# Altium PCB carrier_board.PcbDoc (part 5 of 18)
Units mm, origin at the board's own origin, x right, y up, seen from the top; angles counter-clockwise.
Board outline 146 x 102 mm, 20 copper layers (F.Cu, F.Mask, B.Cu, B.Mask, In1.Cu, F.SilkS, In2.Cu, B.SilkS, F.Adhes, B.Adhes, F.Paste, B.Paste, Dwgs.User, Cmts.User, Eco1.User, Eco2.User, Edge.Cuts, Margin, B.CrtYd, F.CrtYd); 256 components, 384 nets, 1262 pads, 1024 vias.
Unrouted connection lines stored in the file: 117.
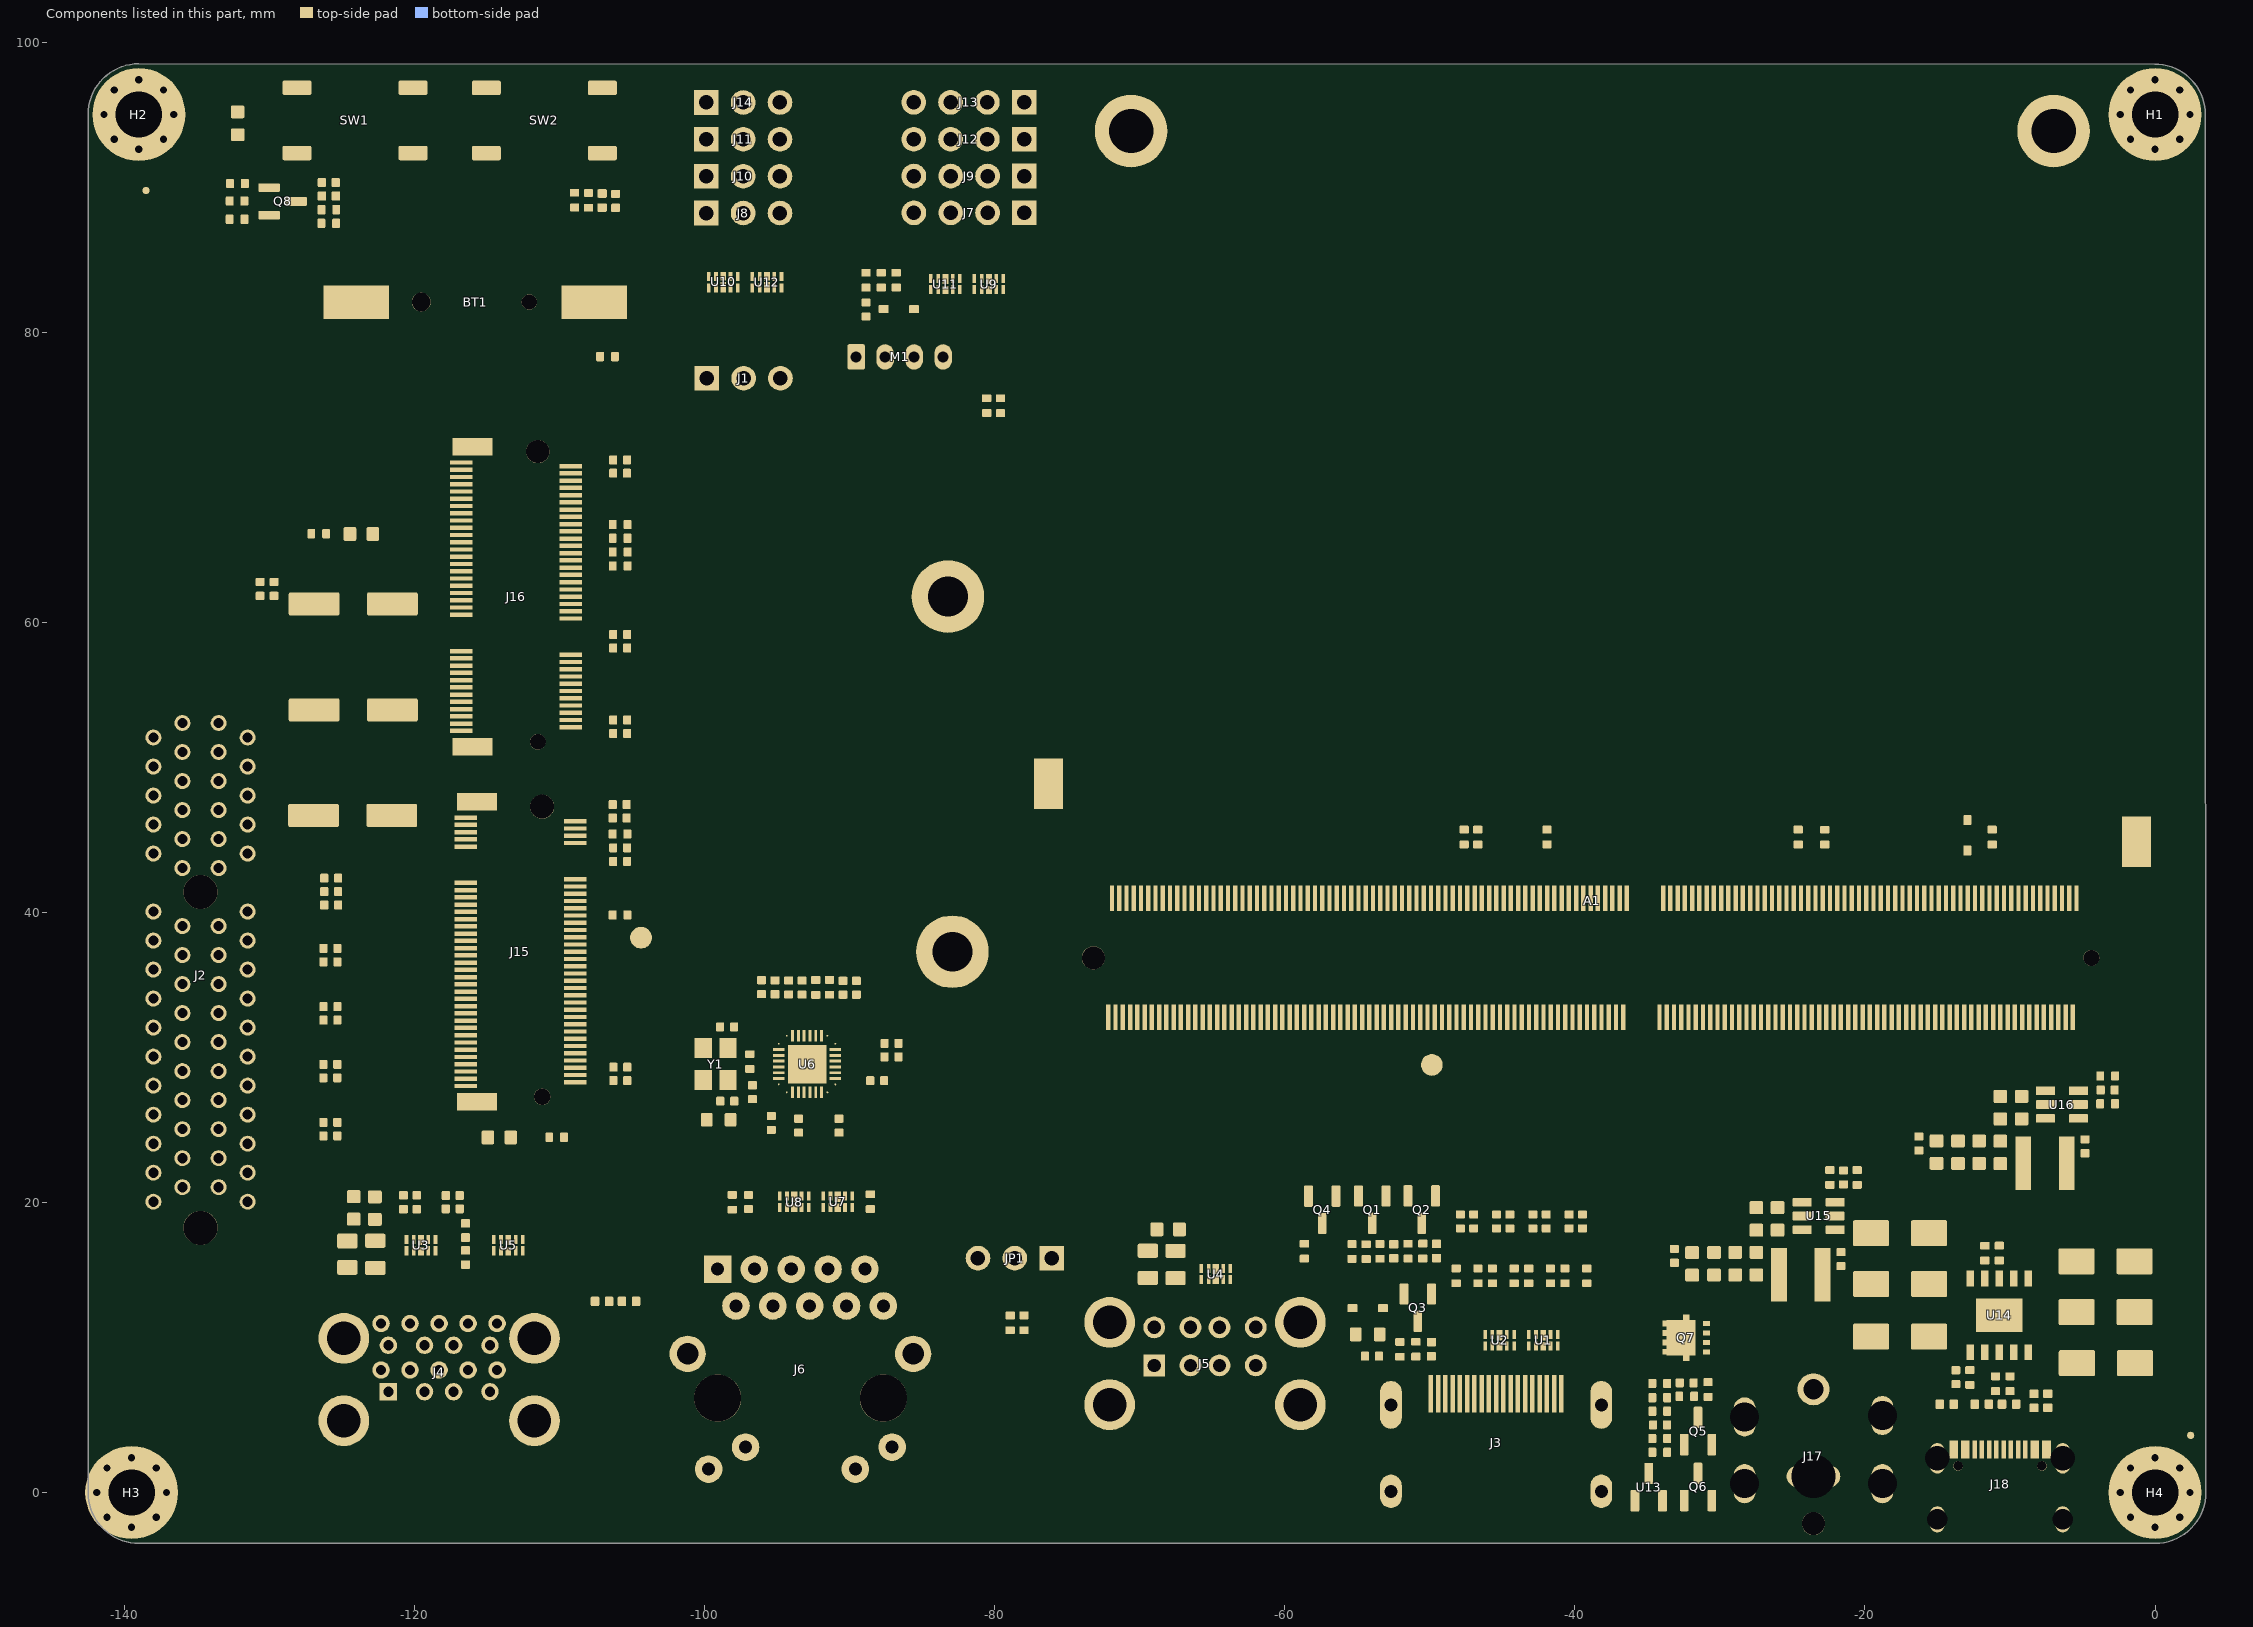
[diagram p16: the components of this part, seen from the top]

## Design rules (kind name [scope] priority, off if disabled: settings) (continued)
PolygonConnect Polygon_F.Cu-Net-(Q8-G)-1_ConnectDirect [IsNamedPolygon('F.Cu-Net-(Q8-G)-1')] p867: connectstyle=Direct reliefconductorwidth=0.254 reliefentries=4 polygonreliefangle="90 Angle" airgapwidth=0.254
PolygonConnect "Polygon_F.Cu-/LattePanda Module/SUSCLK_WIFI-3_ConnectDirect" [IsNamedPolygon('F.Cu-/LattePanda Module/SUSCLK_WIFI-3')] p868: connectstyle=Direct reliefconductorwidth=0.254 reliefentries=4 polygonreliefangle="90 Angle" airgapwidth=0.254
PolygonConnect Polygon_F.Cu-/USB2.0&USB3.0/CON_USB3_SSRX_N_ConnectDirect [IsNamedPolygon('F.Cu-/USB2.0&USB3.0/CON_USB3_SSRX_N')] p869: connectstyle=Direct reliefconductorwidth=0.254 reliefentries=4 polygonreliefangle="90 Angle" airgapwidth=0.254
PolygonConnect Polygon_F.Cu-+1V0-6_ConnectDirect [IsNamedPolygon('F.Cu-+1V0-6')] p870: connectstyle=Direct reliefconductorwidth=0.254 reliefentries=4 polygonreliefangle="90 Angle" airgapwidth=0.254
PolygonConnect Polygon_F.Cu-/USB2.0&USB3.0/CON_USB1_D_P-3_ConnectDirect [IsNamedPolygon('F.Cu-/USB2.0&USB3.0/CON_USB1_D_P-3')] p871: connectstyle=Direct reliefconductorwidth=0.254 reliefentries=4 polygonreliefangle="90 Angle" airgapwidth=0.254
PolygonConnect Polygon_F.Cu-/USB2.0&USB3.0/CON_USB3_SSTX_N-1_ConnectDirect [IsNamedPolygon('F.Cu-/USB2.0&USB3.0/CON_USB3_SSTX_N-1')] p872: connectstyle=Direct reliefconductorwidth=0.254 reliefentries=4 polygonreliefangle="90 Angle" airgapwidth=0.254
PolygonConnect Polygon_F.Cu-Net-(U14-VBUS)-1_ConnectDirect [IsNamedPolygon('F.Cu-Net-(U14-VBUS)-1')] p873: connectstyle=Direct reliefconductorwidth=0.254 reliefentries=4 polygonreliefangle="90 Angle" airgapwidth=0.254
PolygonConnect Polygon_F.Cu-+3V3-35_ConnectDirect [IsNamedPolygon('F.Cu-+3V3-35')] p874: connectstyle=Direct reliefconductorwidth=0.254 reliefentries=4 polygonreliefangle="90 Angle" airgapwidth=0.254
PolygonConnect "Polygon_F.Cu-/LattePanda Module/HSIO_10_TX--2_ConnectDirect" [IsNamedPolygon('F.Cu-/LattePanda Module/HSIO_10_TX--2')] p875: connectstyle=Direct reliefconductorwidth=0.254 reliefentries=4 polygonreliefangle="90 Angle" airgapwidth=0.254
PolygonConnect "Polygon_F.Cu-/LattePanda Module/HSIO_10_TX+-2_ConnectDirect" [IsNamedPolygon('F.Cu-/LattePanda Module/HSIO_10_TX+-2')] p876: connectstyle=Direct reliefconductorwidth=0.254 reliefentries=4 polygonreliefangle="90 Angle" airgapwidth=0.254
PolygonConnect Polygon_F.Cu-/HDMI/DDI_B_TX1+_ConnectDirect [IsNamedPolygon('F.Cu-/HDMI/DDI_B_TX1+')] p877: connectstyle=Direct reliefconductorwidth=0.254 reliefentries=4 polygonreliefangle="90 Angle" airgapwidth=0.254
PolygonConnect Polygon_F.Cu-GND-66_ConnectDirect [IsNamedPolygon('F.Cu-GND-66')] p878: connectstyle=Direct reliefconductorwidth=0.254 reliefentries=4 polygonreliefangle="90 Angle" airgapwidth=0.254
PolygonConnect Polygon_F.Cu-GND-65_ConnectDirect [IsNamedPolygon('F.Cu-GND-65')] p879: connectstyle=Direct reliefconductorwidth=0.254 reliefentries=4 polygonreliefangle="90 Angle" airgapwidth=0.254
PolygonConnect Polygon_F.Cu-/GPIO/SOC_UART0_TX_ConnectDirect [IsNamedPolygon('F.Cu-/GPIO/SOC_UART0_TX')] p880: connectstyle=Direct reliefconductorwidth=0.254 reliefentries=4 polygonreliefangle="90 Angle" airgapwidth=0.254
PolygonConnect "Polygon_F.Cu-/PCIe x4/PCIE30_TX1_P_ConnectDirect" [IsNamedPolygon('F.Cu-/PCIe x4/PCIE30_TX1_P')] p881: connectstyle=Direct reliefconductorwidth=0.254 reliefentries=4 polygonreliefangle="90 Angle" airgapwidth=0.254
PolygonConnect Polygon_F.Cu-+3V3-34_ConnectDirect [IsNamedPolygon('F.Cu-+3V3-34')] p882: connectstyle=Direct reliefconductorwidth=0.254 reliefentries=4 polygonreliefangle="90 Angle" airgapwidth=0.254
PolygonConnect Polygon_F.Cu-Net-(Q7-G)-3_ConnectDirect [IsNamedPolygon('F.Cu-Net-(Q7-G)-3')] p883: connectstyle=Direct reliefconductorwidth=0.254 reliefentries=4 polygonreliefangle="90 Angle" airgapwidth=0.254
PolygonConnect "Polygon_F.Cu-/Gigabit Ethernet/MDI0+_ConnectDirect" [IsNamedPolygon('F.Cu-/Gigabit Ethernet/MDI0+')] p884: connectstyle=Direct reliefconductorwidth=0.254 reliefentries=4 polygonreliefangle="90 Angle" airgapwidth=0.254
PolygonConnect Polygon_F.Cu-/USB2.0&USB3.0/CON_USB1_D_P-2_ConnectDirect [IsNamedPolygon('F.Cu-/USB2.0&USB3.0/CON_USB1_D_P-2')] p885: connectstyle=Direct reliefconductorwidth=0.254 reliefentries=4 polygonreliefangle="90 Angle" airgapwidth=0.254
PolygonConnect Polygon_F.Cu-/GPIO/SOC_UART0_RX-1_ConnectDirect [IsNamedPolygon('F.Cu-/GPIO/SOC_UART0_RX-1')] p886: connectstyle=Direct reliefconductorwidth=0.254 reliefentries=4 polygonreliefangle="90 Angle" airgapwidth=0.254
PolygonConnect Polygon_F.Cu-/USB2.0&USB3.0/CON_USB3_SSRX_P-3_ConnectDirect [IsNamedPolygon('F.Cu-/USB2.0&USB3.0/CON_USB3_SSRX_P-3')] p887: connectstyle=Direct reliefconductorwidth=0.254 reliefentries=4 polygonreliefangle="90 Angle" airgapwidth=0.254
PolygonConnect Polygon_F.Cu-Net-(Q4-G)_ConnectDirect [IsNamedPolygon('F.Cu-Net-(Q4-G)')] p888: connectstyle=Direct reliefconductorwidth=0.254 reliefentries=4 polygonreliefangle="90 Angle" airgapwidth=0.254
PolygonConnect Polygon_F.Cu-GND-64_ConnectDirect [IsNamedPolygon('F.Cu-GND-64')] p889: connectstyle=Direct reliefconductorwidth=0.254 reliefentries=4 polygonreliefangle="90 Angle" airgapwidth=0.254
PolygonConnect Polygon_F.Cu-/HDMI/TMDS_D0+-3_ConnectDirect [IsNamedPolygon('F.Cu-/HDMI/TMDS_D0+-3')] p890: connectstyle=Direct reliefconductorwidth=0.254 reliefentries=4 polygonreliefangle="90 Angle" airgapwidth=0.254
PolygonConnect Polygon_F.Cu-/GPIO/SOC_UART1_RX-2_ConnectDirect [IsNamedPolygon('F.Cu-/GPIO/SOC_UART1_RX-2')] p891: connectstyle=Direct reliefconductorwidth=0.254 reliefentries=4 polygonreliefangle="90 Angle" airgapwidth=0.254
PolygonConnect "Polygon_F.Cu-/LattePanda Module/REFCLK2+_ConnectDirect" [IsNamedPolygon('F.Cu-/LattePanda Module/REFCLK2+')] p892: connectstyle=Direct reliefconductorwidth=0.254 reliefentries=4 polygonreliefangle="90 Angle" airgapwidth=0.254
PolygonConnect Polygon_F.Cu-+1V0-5_ConnectDirect [IsNamedPolygon('F.Cu-+1V0-5')] p893: connectstyle=Direct reliefconductorwidth=0.254 reliefentries=4 polygonreliefangle="90 Angle" airgapwidth=0.254
PolygonConnect "Polygon_F.Cu-/LattePanda Module/SUSCLK_WIFI-2_ConnectDirect" [IsNamedPolygon('F.Cu-/LattePanda Module/SUSCLK_WIFI-2')] p894: connectstyle=Direct reliefconductorwidth=0.254 reliefentries=4 polygonreliefangle="90 Angle" airgapwidth=0.254
PolygonConnect "Polygon_F.Cu-/M.2 E&M Key/~{CLKREQE}-1_ConnectDirect" [IsNamedPolygon('F.Cu-/M.2 E&M Key/~{CLKREQE}-1')] p895: connectstyle=Direct reliefconductorwidth=0.254 reliefentries=4 polygonreliefangle="90 Angle" airgapwidth=0.254
PolygonConnect "Polygon_F.Cu-/LattePanda Module/USB_2_P7+-1_ConnectDirect" [IsNamedPolygon('F.Cu-/LattePanda Module/USB_2_P7+-1')] p896: connectstyle=Direct reliefconductorwidth=0.254 reliefentries=4 polygonreliefangle="90 Angle" airgapwidth=0.254
PolygonConnect Polygon_F.Cu-Net-(Q5-D)-1_ConnectDirect [IsNamedPolygon('F.Cu-Net-(Q5-D)-1')] p897: connectstyle=Direct reliefconductorwidth=0.254 reliefentries=4 polygonreliefangle="90 Angle" airgapwidth=0.254
PolygonConnect "Polygon_F.Cu-/LattePanda Module/REFCLK0-_ConnectDirect" [IsNamedPolygon('F.Cu-/LattePanda Module/REFCLK0-')] p898: connectstyle=Direct reliefconductorwidth=0.254 reliefentries=4 polygonreliefangle="90 Angle" airgapwidth=0.254
PolygonConnect Polygon_F.Cu-GND-63_ConnectDirect [IsNamedPolygon('F.Cu-GND-63')] p899: connectstyle=Direct reliefconductorwidth=0.254 reliefentries=4 polygonreliefangle="90 Angle" airgapwidth=0.254
PolygonConnect Polygon_F.Cu-/PSU/PWR_EN-4_ConnectDirect [IsNamedPolygon('F.Cu-/PSU/PWR_EN-4')] p900: connectstyle=Direct reliefconductorwidth=0.254 reliefentries=4 polygonreliefangle="90 Angle" airgapwidth=0.254
PolygonConnect Polygon_F.Cu-GND-62_ConnectDirect [IsNamedPolygon('F.Cu-GND-62')] p901: connectstyle=Direct reliefconductorwidth=0.254 reliefentries=4 polygonreliefangle="90 Angle" airgapwidth=0.254
PolygonConnect Polygon_F.Cu-/~{PLT_RST}-2_ConnectDirect [IsNamedPolygon('F.Cu-/~{PLT_RST}-2')] p902: connectstyle=Direct reliefconductorwidth=0.254 reliefentries=4 polygonreliefangle="90 Angle" airgapwidth=0.254
PolygonConnect Polygon_F.Cu-/GPIO/I2C2_SCL-2_ConnectDirect [IsNamedPolygon('F.Cu-/GPIO/I2C2_SCL-2')] p903: connectstyle=Direct reliefconductorwidth=0.254 reliefentries=4 polygonreliefangle="90 Angle" airgapwidth=0.254
PolygonConnect Polygon_F.Cu-Net-(Q5-S)_ConnectDirect [IsNamedPolygon('F.Cu-Net-(Q5-S)')] p904: connectstyle=Direct reliefconductorwidth=0.254 reliefentries=4 polygonreliefangle="90 Angle" airgapwidth=0.254
PolygonConnect Polygon_F.Cu-/HDMI/TMDS_D0+-2_ConnectDirect [IsNamedPolygon('F.Cu-/HDMI/TMDS_D0+-2')] p905: connectstyle=Direct reliefconductorwidth=0.254 reliefentries=4 polygonreliefangle="90 Angle" airgapwidth=0.254
PolygonConnect Polygon_F.Cu-/HDMI/TMDS_D2--2_ConnectDirect [IsNamedPolygon('F.Cu-/HDMI/TMDS_D2--2')] p906: connectstyle=Direct reliefconductorwidth=0.254 reliefentries=4 polygonreliefangle="90 Angle" airgapwidth=0.254
PolygonConnect Polygon_F.Cu-+12VA_ConnectDirect [IsNamedPolygon('F.Cu-+12VA')] p907: connectstyle=Direct reliefconductorwidth=0.254 reliefentries=4 polygonreliefangle="90 Angle" airgapwidth=0.254
PolygonConnect Polygon_F.Cu-Net-(U15-SW)_ConnectDirect [IsNamedPolygon('F.Cu-Net-(U15-SW)')] p908: connectstyle=Direct reliefconductorwidth=0.254 reliefentries=4 polygonreliefangle="90 Angle" airgapwidth=0.254
PolygonConnect "Polygon_F.Cu-/PCIe x4/PCIE30_TX2_P-1_ConnectDirect" [IsNamedPolygon('F.Cu-/PCIe x4/PCIE30_TX2_P-1')] p909: connectstyle=Direct reliefconductorwidth=0.254 reliefentries=4 polygonreliefangle="90 Angle" airgapwidth=0.254
PolygonConnect Polygon_F.Cu-/~{WAKE}-2_ConnectDirect [IsNamedPolygon('F.Cu-/~{WAKE}-2')] p910: connectstyle=Direct reliefconductorwidth=0.254 reliefentries=4 polygonreliefangle="90 Angle" airgapwidth=0.254
PolygonConnect Polygon_F.Cu-+3V3-33_ConnectDirect [IsNamedPolygon('F.Cu-+3V3-33')] p911: connectstyle=Direct reliefconductorwidth=0.254 reliefentries=4 polygonreliefangle="90 Angle" airgapwidth=0.254
PolygonConnect Polygon_F.Cu-+3V3-32_ConnectDirect [IsNamedPolygon('F.Cu-+3V3-32')] p912: connectstyle=Direct reliefconductorwidth=0.254 reliefentries=4 polygonreliefangle="90 Angle" airgapwidth=0.254
PolygonConnect "Polygon_F.Cu-/LattePanda Module/HSIO_11_TX+_ConnectDirect" [IsNamedPolygon('F.Cu-/LattePanda Module/HSIO_11_TX+')] p913: connectstyle=Direct reliefconductorwidth=0.254 reliefentries=4 polygonreliefangle="90 Angle" airgapwidth=0.254
PolygonConnect Polygon_F.Cu-/HDMI/TMDS_D1--2_ConnectDirect [IsNamedPolygon('F.Cu-/HDMI/TMDS_D1--2')] p914: connectstyle=Direct reliefconductorwidth=0.254 reliefentries=4 polygonreliefangle="90 Angle" airgapwidth=0.254
PolygonConnect Polygon_F.Cu-Net-(U14-VBUS)_ConnectDirect [IsNamedPolygon('F.Cu-Net-(U14-VBUS)')] p915: connectstyle=Direct reliefconductorwidth=0.254 reliefentries=4 polygonreliefangle="90 Angle" airgapwidth=0.254
PolygonConnect Polygon_F.Cu-GND-61_ConnectDirect [IsNamedPolygon('F.Cu-GND-61')] p916: connectstyle=Direct reliefconductorwidth=0.254 reliefentries=4 polygonreliefangle="90 Angle" airgapwidth=0.254
PolygonConnect Polygon_F.Cu-/GPIO/SOC_UART2_RX-3_ConnectDirect [IsNamedPolygon('F.Cu-/GPIO/SOC_UART2_RX-3')] p917: connectstyle=Direct reliefconductorwidth=0.254 reliefentries=4 polygonreliefangle="90 Angle" airgapwidth=0.254
PolygonConnect Polygon_F.Cu-Net-(A1-TCP1_HPD)_ConnectDirect [IsNamedPolygon('F.Cu-Net-(A1-TCP1_HPD)')] p918: connectstyle=Direct reliefconductorwidth=0.254 reliefentries=4 polygonreliefangle="90 Angle" airgapwidth=0.254
PolygonConnect Polygon_F.Cu-Net-(D9-A)_ConnectDirect [IsNamedPolygon('F.Cu-Net-(D9-A)')] p919: connectstyle=Direct reliefconductorwidth=0.254 reliefentries=4 polygonreliefangle="90 Angle" airgapwidth=0.254
PolygonConnect Polygon_F.Cu-+3V3-31_ConnectDirect [IsNamedPolygon('F.Cu-+3V3-31')] p920: connectstyle=Direct reliefconductorwidth=0.254 reliefentries=4 polygonreliefangle="90 Angle" airgapwidth=0.254
PolygonConnect "Polygon_F.Cu-/M.2 E&M Key/CON_PCIE_TX_1-_ConnectDirect" [IsNamedPolygon('F.Cu-/M.2 E&M Key/CON_PCIE_TX_1-')] p921: connectstyle=Direct reliefconductorwidth=0.254 reliefentries=4 polygonreliefangle="90 Angle" airgapwidth=0.254
PolygonConnect Polygon_F.Cu-VPullup-2_ConnectDirect [IsNamedPolygon('F.Cu-VPullup-2')] p922: connectstyle=Direct reliefconductorwidth=0.254 reliefentries=4 polygonreliefangle="90 Angle" airgapwidth=0.254
PolygonConnect "Polygon_F.Cu-/M.2 E&M Key/CON_PCIE_TX_1+_ConnectDirect" [IsNamedPolygon('F.Cu-/M.2 E&M Key/CON_PCIE_TX_1+')] p923: connectstyle=Direct reliefconductorwidth=0.254 reliefentries=4 polygonreliefangle="90 Angle" airgapwidth=0.254
PolygonConnect Polygon_F.Cu-GND-60_ConnectDirect [IsNamedPolygon('F.Cu-GND-60')] p924: connectstyle=Direct reliefconductorwidth=0.254 reliefentries=4 polygonreliefangle="90 Angle" airgapwidth=0.254
PolygonConnect Polygon_F.Cu-Net-(Q5-G)-1_ConnectDirect [IsNamedPolygon('F.Cu-Net-(Q5-G)-1')] p925: connectstyle=Direct reliefconductorwidth=0.254 reliefentries=4 polygonreliefangle="90 Angle" airgapwidth=0.254
PolygonConnect Polygon_F.Cu-Net-(J16-~{W_DISABLE2})-1_ConnectDirect [IsNamedPolygon('F.Cu-Net-(J16-~{W_DISABLE2})-1')] p926: connectstyle=Direct reliefconductorwidth=0.254 reliefentries=4 polygonreliefangle="90 Angle" airgapwidth=0.254
PolygonConnect "Polygon_F.Cu-/LattePanda Module/HSIO_2_TX--1_ConnectDirect" [IsNamedPolygon('F.Cu-/LattePanda Module/HSIO_2_TX--1')] p927: connectstyle=Direct reliefconductorwidth=0.254 reliefentries=4 polygonreliefangle="90 Angle" airgapwidth=0.254
PolygonConnect Polygon_F.Cu-GND-59_ConnectDirect [IsNamedPolygon('F.Cu-GND-59')] p928: connectstyle=Direct reliefconductorwidth=0.254 reliefentries=4 polygonreliefangle="90 Angle" airgapwidth=0.254
PolygonConnect Polygon_F.Cu-GND-58_ConnectDirect [IsNamedPolygon('F.Cu-GND-58')] p929: connectstyle=Direct reliefconductorwidth=0.254 reliefentries=4 polygonreliefangle="90 Angle" airgapwidth=0.254
PolygonConnect Polygon_F.Cu-Net-(U14-CFG1)-1_ConnectDirect [IsNamedPolygon('F.Cu-Net-(U14-CFG1)-1')] p930: connectstyle=Direct reliefconductorwidth=0.254 reliefentries=4 polygonreliefangle="90 Angle" airgapwidth=0.254
PolygonConnect Polygon_F.Cu-/USB2.0&USB3.0/CON_USB4_SSRX_P_ConnectDirect [IsNamedPolygon('F.Cu-/USB2.0&USB3.0/CON_USB4_SSRX_P')] p931: connectstyle=Direct reliefconductorwidth=0.254 reliefentries=4 polygonreliefangle="90 Angle" airgapwidth=0.254
PolygonConnect "Polygon_F.Cu-/Gigabit Ethernet/GbE_PCIe_RX-_ConnectDirect" [IsNamedPolygon('F.Cu-/Gigabit Ethernet/GbE_PCIe_RX-')] p932: connectstyle=Direct reliefconductorwidth=0.254 reliefentries=4 polygonreliefangle="90 Angle" airgapwidth=0.254
PolygonConnect "Polygon_F.Cu-/LattePanda Module/HSIO_2_TX+_ConnectDirect" [IsNamedPolygon('F.Cu-/LattePanda Module/HSIO_2_TX+')] p933: connectstyle=Direct reliefconductorwidth=0.254 reliefentries=4 polygonreliefangle="90 Angle" airgapwidth=0.254
PolygonConnect Polygon_F.Cu-+3V3-30_ConnectDirect [IsNamedPolygon('F.Cu-+3V3-30')] p934: connectstyle=Direct reliefconductorwidth=0.254 reliefentries=4 polygonreliefangle="90 Angle" airgapwidth=0.254
PolygonConnect Polygon_F.Cu-Net-(U6-LANWAKEB)-1_ConnectDirect [IsNamedPolygon('F.Cu-Net-(U6-LANWAKEB)-1')] p935: connectstyle=Direct reliefconductorwidth=0.254 reliefentries=4 polygonreliefangle="90 Angle" airgapwidth=0.254
PolygonConnect Polygon_F.Cu-+3V3-29_ConnectDirect [IsNamedPolygon('F.Cu-+3V3-29')] p936: connectstyle=Direct reliefconductorwidth=0.254 reliefentries=4 polygonreliefangle="90 Angle" airgapwidth=0.254
PolygonConnect Polygon_F.Cu-Net-(D25-A2)-1_ConnectDirect [IsNamedPolygon('F.Cu-Net-(D25-A2)-1')] p937: connectstyle=Direct reliefconductorwidth=0.254 reliefentries=4 polygonreliefangle="90 Angle" airgapwidth=0.254
PolygonConnect Polygon_F.Cu-GND-57_ConnectDirect [IsNamedPolygon('F.Cu-GND-57')] p938: connectstyle=Direct reliefconductorwidth=0.254 reliefentries=4 polygonreliefangle="90 Angle" airgapwidth=0.254
PolygonConnect Polygon_F.Cu-/GPIO/SOC_UART2_RX-2_ConnectDirect [IsNamedPolygon('F.Cu-/GPIO/SOC_UART2_RX-2')] p939: connectstyle=Direct reliefconductorwidth=0.254 reliefentries=4 polygonreliefangle="90 Angle" airgapwidth=0.254
PolygonConnect Polygon_F.Cu-GND-56_ConnectDirect [IsNamedPolygon('F.Cu-GND-56')] p940: connectstyle=Direct reliefconductorwidth=0.254 reliefentries=4 polygonreliefangle="90 Angle" airgapwidth=0.254
PolygonConnect Polygon_F.Cu-/USB2.0&USB3.0/CON_USB4_SSRX_N-2_ConnectDirect [IsNamedPolygon('F.Cu-/USB2.0&USB3.0/CON_USB4_SSRX_N-2')] p941: connectstyle=Direct reliefconductorwidth=0.254 reliefentries=4 polygonreliefangle="90 Angle" airgapwidth=0.254
PolygonConnect Polygon_F.Cu-/GPIO/I2C2_SCL-1_ConnectDirect [IsNamedPolygon('F.Cu-/GPIO/I2C2_SCL-1')] p942: connectstyle=Direct reliefconductorwidth=0.254 reliefentries=4 polygonreliefangle="90 Angle" airgapwidth=0.254
PolygonConnect Polygon_F.Cu-GND-55_ConnectDirect [IsNamedPolygon('F.Cu-GND-55')] p943: connectstyle=Direct reliefconductorwidth=0.254 reliefentries=4 polygonreliefangle="90 Angle" airgapwidth=0.254
PolygonConnect Polygon_F.Cu-Net-(Q5-G)_ConnectDirect [IsNamedPolygon('F.Cu-Net-(Q5-G)')] p944: connectstyle=Direct reliefconductorwidth=0.254 reliefentries=4 polygonreliefangle="90 Angle" airgapwidth=0.254
PolygonConnect "Polygon_F.Cu-/LattePanda Module/USB_2_P7--1_ConnectDirect" [IsNamedPolygon('F.Cu-/LattePanda Module/USB_2_P7--1')] p945: connectstyle=Direct reliefconductorwidth=0.254 reliefentries=4 polygonreliefangle="90 Angle" airgapwidth=0.254
PolygonConnect Polygon_F.Cu-/HDMI/TMDS_D2+-2_ConnectDirect [IsNamedPolygon('F.Cu-/HDMI/TMDS_D2+-2')] p946: connectstyle=Direct reliefconductorwidth=0.254 reliefentries=4 polygonreliefangle="90 Angle" airgapwidth=0.254
PolygonConnect "Polygon_F.Cu-/Gigabit Ethernet/MDI3--1_ConnectDirect" [IsNamedPolygon('F.Cu-/Gigabit Ethernet/MDI3--1')] p947: connectstyle=Direct reliefconductorwidth=0.254 reliefentries=4 polygonreliefangle="90 Angle" airgapwidth=0.254
PolygonConnect Polygon_F.Cu-/~{PLT_RST}-1_ConnectDirect [IsNamedPolygon('F.Cu-/~{PLT_RST}-1')] p948: connectstyle=Direct reliefconductorwidth=0.254 reliefentries=4 polygonreliefangle="90 Angle" airgapwidth=0.254
PolygonConnect "Polygon_F.Cu-/LattePanda Module/HSIO_9_TX+-1_ConnectDirect" [IsNamedPolygon('F.Cu-/LattePanda Module/HSIO_9_TX+-1')] p949: connectstyle=Direct reliefconductorwidth=0.254 reliefentries=4 polygonreliefangle="90 Angle" airgapwidth=0.254
PolygonConnect "Polygon_F.Cu-/LattePanda Module/HSIO_3_TX+_ConnectDirect" [IsNamedPolygon('F.Cu-/LattePanda Module/HSIO_3_TX+')] p950: connectstyle=Direct reliefconductorwidth=0.254 reliefentries=4 polygonreliefangle="90 Angle" airgapwidth=0.254
PolygonConnect Polygon_F.Cu-+3V3-28_ConnectDirect [IsNamedPolygon('F.Cu-+3V3-28')] p951: connectstyle=Direct reliefconductorwidth=0.254 reliefentries=4 polygonreliefangle="90 Angle" airgapwidth=0.254
PolygonConnect Polygon_F.Cu-GND-54_ConnectDirect [IsNamedPolygon('F.Cu-GND-54')] p952: connectstyle=Direct reliefconductorwidth=0.254 reliefentries=4 polygonreliefangle="90 Angle" airgapwidth=0.254
PolygonConnect "Polygon_F.Cu-/LattePanda Module/USB_2_P7+_ConnectDirect" [IsNamedPolygon('F.Cu-/LattePanda Module/USB_2_P7+')] p953: connectstyle=Direct reliefconductorwidth=0.254 reliefentries=4 polygonreliefangle="90 Angle" airgapwidth=0.254
PolygonConnect Polygon_F.Cu-GND-53_ConnectDirect [IsNamedPolygon('F.Cu-GND-53')] p954: connectstyle=Direct reliefconductorwidth=0.254 reliefentries=4 polygonreliefangle="90 Angle" airgapwidth=0.254
PolygonConnect Polygon_F.Cu-Net-(A1-TCP0_HPD)_ConnectDirect [IsNamedPolygon('F.Cu-Net-(A1-TCP0_HPD)')] p955: connectstyle=Direct reliefconductorwidth=0.254 reliefentries=4 polygonreliefangle="90 Angle" airgapwidth=0.254
PolygonConnect Polygon_F.Cu-+3V3-27_ConnectDirect [IsNamedPolygon('F.Cu-+3V3-27')] p956: connectstyle=Direct reliefconductorwidth=0.254 reliefentries=4 polygonreliefangle="90 Angle" airgapwidth=0.254
PolygonConnect Polygon_F.Cu-GND-52_ConnectDirect [IsNamedPolygon('F.Cu-GND-52')] p957: connectstyle=Direct reliefconductorwidth=0.254 reliefentries=4 polygonreliefangle="90 Angle" airgapwidth=0.254
PolygonConnect Polygon_F.Cu-/HDMI/TMDS_D2--1_ConnectDirect [IsNamedPolygon('F.Cu-/HDMI/TMDS_D2--1')] p958: connectstyle=Direct reliefconductorwidth=0.254 reliefentries=4 polygonreliefangle="90 Angle" airgapwidth=0.254
PolygonConnect Polygon_F.Cu-GND-51_ConnectDirect [IsNamedPolygon('F.Cu-GND-51')] p959: connectstyle=Direct reliefconductorwidth=0.254 reliefentries=4 polygonreliefangle="90 Angle" airgapwidth=0.254
PolygonConnect Polygon_F.Cu-+3V3-26_ConnectDirect [IsNamedPolygon('F.Cu-+3V3-26')] p960: connectstyle=Direct reliefconductorwidth=0.254 reliefentries=4 polygonreliefangle="90 Angle" airgapwidth=0.254
PolygonConnect Polygon_F.Cu-+5V-4_ConnectDirect [IsNamedPolygon('F.Cu-+5V-4')] p961: connectstyle=Direct reliefconductorwidth=0.254 reliefentries=4 polygonreliefangle="90 Angle" airgapwidth=0.254
PolygonConnect Polygon_F.Cu-Net-(Q5-D)_ConnectDirect [IsNamedPolygon('F.Cu-Net-(Q5-D)')] p962: connectstyle=Direct reliefconductorwidth=0.254 reliefentries=4 polygonreliefangle="90 Angle" airgapwidth=0.254
PolygonConnect "Polygon_F.Cu-/M.2 E&M Key/CON_PCIE_TX_0+_ConnectDirect" [IsNamedPolygon('F.Cu-/M.2 E&M Key/CON_PCIE_TX_0+')] p963: connectstyle=Direct reliefconductorwidth=0.254 reliefentries=4 polygonreliefangle="90 Angle" airgapwidth=0.254
PolygonConnect Polygon_F.Cu-Net-(U6-ISOLATEB)-1_ConnectDirect [IsNamedPolygon('F.Cu-Net-(U6-ISOLATEB)-1')] p964: connectstyle=Direct reliefconductorwidth=0.254 reliefentries=4 polygonreliefangle="90 Angle" airgapwidth=0.254
PolygonConnect "Polygon_F.Cu-/LattePanda Module/HSIO_8_TX--2_ConnectDirect" [IsNamedPolygon('F.Cu-/LattePanda Module/HSIO_8_TX--2')] p965: connectstyle=Direct reliefconductorwidth=0.254 reliefentries=4 polygonreliefangle="90 Angle" airgapwidth=0.254
PolygonConnect Polygon_F.Cu-Net-(BT1-+)_ConnectDirect [IsNamedPolygon('F.Cu-Net-(BT1-+)')] p966: connectstyle=Direct reliefconductorwidth=0.254 reliefentries=4 polygonreliefangle="90 Angle" airgapwidth=0.254
PolygonConnect Polygon_F.Cu-+3V3-25_ConnectDirect [IsNamedPolygon('F.Cu-+3V3-25')] p967: connectstyle=Direct reliefconductorwidth=0.254 reliefentries=4 polygonreliefangle="90 Angle" airgapwidth=0.254
PolygonConnect Polygon_F.Cu-GND-50_ConnectDirect [IsNamedPolygon('F.Cu-GND-50')] p968: connectstyle=Direct reliefconductorwidth=0.254 reliefentries=4 polygonreliefangle="90 Angle" airgapwidth=0.254
PolygonConnect Polygon_F.Cu-VDC-1_ConnectDirect [IsNamedPolygon('F.Cu-VDC-1')] p969: connectstyle=Direct reliefconductorwidth=0.254 reliefentries=4 polygonreliefangle="90 Angle" airgapwidth=0.254
PolygonConnect Polygon_F.Cu-/USB2.0&USB3.0/CON_USB2_D_N-2_ConnectDirect [IsNamedPolygon('F.Cu-/USB2.0&USB3.0/CON_USB2_D_N-2')] p970: connectstyle=Direct reliefconductorwidth=0.254 reliefentries=4 polygonreliefangle="90 Angle" airgapwidth=0.254
PolygonConnect "Polygon_F.Cu-/LattePanda Module/REFCLK0+-1_ConnectDirect" [IsNamedPolygon('F.Cu-/LattePanda Module/REFCLK0+-1')] p971: connectstyle=Direct reliefconductorwidth=0.254 reliefentries=4 polygonreliefangle="90 Angle" airgapwidth=0.254
PolygonConnect Polygon_F.Cu-/USB2.0&USB3.0/CON_USB2_D_P-1_ConnectDirect [IsNamedPolygon('F.Cu-/USB2.0&USB3.0/CON_USB2_D_P-1')] p972: connectstyle=Direct reliefconductorwidth=0.254 reliefentries=4 polygonreliefangle="90 Angle" airgapwidth=0.254
PolygonConnect Polygon_F.Cu-/USB2.0&USB3.0/CON_USB4_D_N-3_ConnectDirect [IsNamedPolygon('F.Cu-/USB2.0&USB3.0/CON_USB4_D_N-3')] p973: connectstyle=Direct reliefconductorwidth=0.254 reliefentries=4 polygonreliefangle="90 Angle" airgapwidth=0.254
PolygonConnect Polygon_F.Cu-Net-(D23-A)_ConnectDirect [IsNamedPolygon('F.Cu-Net-(D23-A)')] p974: connectstyle=Direct reliefconductorwidth=0.254 reliefentries=4 polygonreliefangle="90 Angle" airgapwidth=0.254
PolygonConnect Polygon_F.Cu-/HDMI/DDI_B_DDC_SCL-1_ConnectDirect [IsNamedPolygon('F.Cu-/HDMI/DDI_B_DDC_SCL-1')] p975: connectstyle=Direct reliefconductorwidth=0.254 reliefentries=4 polygonreliefangle="90 Angle" airgapwidth=0.254
PolygonConnect Polygon_F.Cu-/Fan_Temp/FAN_1_TAC-1_ConnectDirect [IsNamedPolygon('F.Cu-/Fan_Temp/FAN_1_TAC-1')] p976: connectstyle=Direct reliefconductorwidth=0.254 reliefentries=4 polygonreliefangle="90 Angle" airgapwidth=0.254
PolygonConnect "Polygon_F.Cu-/PCIe x4/PCIE30_TX0_P_ConnectDirect" [IsNamedPolygon('F.Cu-/PCIe x4/PCIE30_TX0_P')] p977: connectstyle=Direct reliefconductorwidth=0.254 reliefentries=4 polygonreliefangle="90 Angle" airgapwidth=0.254
PolygonConnect Polygon_F.Cu-Net-(U16-SW)_ConnectDirect [IsNamedPolygon('F.Cu-Net-(U16-SW)')] p978: connectstyle=Direct reliefconductorwidth=0.254 reliefentries=4 polygonreliefangle="90 Angle" airgapwidth=0.254
PolygonConnect Polygon_F.Cu-/GPIO/SOC_UART1_TX_ConnectDirect [IsNamedPolygon('F.Cu-/GPIO/SOC_UART1_TX')] p979: connectstyle=Direct reliefconductorwidth=0.254 reliefentries=4 polygonreliefangle="90 Angle" airgapwidth=0.254
PolygonConnect Polygon_F.Cu-+3V3-24_ConnectDirect [IsNamedPolygon('F.Cu-+3V3-24')] p980: connectstyle=Direct reliefconductorwidth=0.254 reliefentries=4 polygonreliefangle="90 Angle" airgapwidth=0.254
PolygonConnect Polygon_F.Cu-GND-49_ConnectDirect [IsNamedPolygon('F.Cu-GND-49')] p981: connectstyle=Direct reliefconductorwidth=0.254 reliefentries=4 polygonreliefangle="90 Angle" airgapwidth=0.254
PolygonConnect Polygon_F.Cu-GND-48_ConnectDirect [IsNamedPolygon('F.Cu-GND-48')] p982: connectstyle=Direct reliefconductorwidth=0.254 reliefentries=4 polygonreliefangle="90 Angle" airgapwidth=0.254
PolygonConnect Polygon_F.Cu-/HDMI/TMDS_D0--1_ConnectDirect [IsNamedPolygon('F.Cu-/HDMI/TMDS_D0--1')] p983: connectstyle=Direct reliefconductorwidth=0.254 reliefentries=4 polygonreliefangle="90 Angle" airgapwidth=0.254
PolygonConnect "Polygon_F.Cu-/LattePanda Module/~{PWR_SW}-1_ConnectDirect" [IsNamedPolygon('F.Cu-/LattePanda Module/~{PWR_SW}-1')] p984: connectstyle=Direct reliefconductorwidth=0.254 reliefentries=4 polygonreliefangle="90 Angle" airgapwidth=0.254
PolygonConnect Polygon_F.Cu-/HDMI/TMDS_D0+-1_ConnectDirect [IsNamedPolygon('F.Cu-/HDMI/TMDS_D0+-1')] p985: connectstyle=Direct reliefconductorwidth=0.254 reliefentries=4 polygonreliefangle="90 Angle" airgapwidth=0.254
PolygonConnect Polygon_F.Cu-/HDMI/TMDS_CK--1_ConnectDirect [IsNamedPolygon('F.Cu-/HDMI/TMDS_CK--1')] p986: connectstyle=Direct reliefconductorwidth=0.254 reliefentries=4 polygonreliefangle="90 Angle" airgapwidth=0.254
PolygonConnect Polygon_F.Cu-/GPIO/SOC_UART2_RX-1_ConnectDirect [IsNamedPolygon('F.Cu-/GPIO/SOC_UART2_RX-1')] p987: connectstyle=Direct reliefconductorwidth=0.254 reliefentries=4 polygonreliefangle="90 Angle" airgapwidth=0.254
PolygonConnect Polygon_F.Cu-+3V3-23_ConnectDirect [IsNamedPolygon('F.Cu-+3V3-23')] p988: connectstyle=Direct reliefconductorwidth=0.254 reliefentries=4 polygonreliefangle="90 Angle" airgapwidth=0.254
PolygonConnect Polygon_F.Cu-GND-47_ConnectDirect [IsNamedPolygon('F.Cu-GND-47')] p989: connectstyle=Direct reliefconductorwidth=0.254 reliefentries=4 polygonreliefangle="90 Angle" airgapwidth=0.254
PolygonConnect Polygon_F.Cu-/~{WAKE}-1_ConnectDirect [IsNamedPolygon('F.Cu-/~{WAKE}-1')] p990: connectstyle=Direct reliefconductorwidth=0.254 reliefentries=4 polygonreliefangle="90 Angle" airgapwidth=0.254
PolygonConnect Polygon_F.Cu-+3V3-22_ConnectDirect [IsNamedPolygon('F.Cu-+3V3-22')] p991: connectstyle=Direct reliefconductorwidth=0.254 reliefentries=4 polygonreliefangle="90 Angle" airgapwidth=0.254
PolygonConnect "Polygon_F.Cu-/LattePanda Module/HSIO_8_RX-_ConnectDirect" [IsNamedPolygon('F.Cu-/LattePanda Module/HSIO_8_RX-')] p992: connectstyle=Direct reliefconductorwidth=0.254 reliefentries=4 polygonreliefangle="90 Angle" airgapwidth=0.254
PolygonConnect "Polygon_F.Cu-/LattePanda Module/HSIO_10_TX+-1_ConnectDirect" [IsNamedPolygon('F.Cu-/LattePanda Module/HSIO_10_TX+-1')] p993: connectstyle=Direct reliefconductorwidth=0.254 reliefentries=4 polygonreliefangle="90 Angle" airgapwidth=0.254
PolygonConnect Polygon_F.Cu-Net-(U13-REF)-2_ConnectDirect [IsNamedPolygon('F.Cu-Net-(U13-REF)-2')] p994: connectstyle=Direct reliefconductorwidth=0.254 reliefentries=4 polygonreliefangle="90 Angle" airgapwidth=0.254
PolygonConnect Polygon_F.Cu-+1V0-4_ConnectDirect [IsNamedPolygon('F.Cu-+1V0-4')] p995: connectstyle=Direct reliefconductorwidth=0.254 reliefentries=4 polygonreliefangle="90 Angle" airgapwidth=0.254
PolygonConnect Polygon_F.Cu-VPullup-1_ConnectDirect [IsNamedPolygon('F.Cu-VPullup-1')] p996: connectstyle=Direct reliefconductorwidth=0.254 reliefentries=4 polygonreliefangle="90 Angle" airgapwidth=0.254
PolygonConnect Polygon_F.Cu-Net-(U10-NC-Pad6)_ConnectDirect [IsNamedPolygon('F.Cu-Net-(U10-NC-Pad6)')] p997: connectstyle=Direct reliefconductorwidth=0.254 reliefentries=4 polygonreliefangle="90 Angle" airgapwidth=0.254
PolygonConnect Polygon_F.Cu-GND-46_ConnectDirect [IsNamedPolygon('F.Cu-GND-46')] p998: connectstyle=Direct reliefconductorwidth=0.254 reliefentries=4 polygonreliefangle="90 Angle" airgapwidth=0.254
PolygonConnect Polygon_F.Cu-GND-45_ConnectDirect [IsNamedPolygon('F.Cu-GND-45')] p999: connectstyle=Direct reliefconductorwidth=0.254 reliefentries=4 polygonreliefangle="90 Angle" airgapwidth=0.254
PolygonConnect "Polygon_F.Cu-/LattePanda Module/HSIO_10_TX--1_ConnectDirect" [IsNamedPolygon('F.Cu-/LattePanda Module/HSIO_10_TX--1')] p1000: connectstyle=Direct reliefconductorwidth=0.254 reliefentries=4 polygonreliefangle="90 Angle" airgapwidth=0.254
PolygonConnect Polygon_F.Cu-/PSU/PWR_EN-3_ConnectDirect [IsNamedPolygon('F.Cu-/PSU/PWR_EN-3')] p1001: connectstyle=Direct reliefconductorwidth=0.254 reliefentries=4 polygonreliefangle="90 Angle" airgapwidth=0.254
PolygonConnect Polygon_F.Cu-Net-(D21-A2)-2_ConnectDirect [IsNamedPolygon('F.Cu-Net-(D21-A2)-2')] p1002: connectstyle=Direct reliefconductorwidth=0.254 reliefentries=4 polygonreliefangle="90 Angle" airgapwidth=0.254
PolygonConnect "Polygon_F.Cu-/LattePanda Module/HSIO_9_TX-_ConnectDirect" [IsNamedPolygon('F.Cu-/LattePanda Module/HSIO_9_TX-')] p1003: connectstyle=Direct reliefconductorwidth=0.254 reliefentries=4 polygonreliefangle="90 Angle" airgapwidth=0.254
PolygonConnect Polygon_F.Cu-/PSU/PWR_EN-2_ConnectDirect [IsNamedPolygon('F.Cu-/PSU/PWR_EN-2')] p1004: connectstyle=Direct reliefconductorwidth=0.254 reliefentries=4 polygonreliefangle="90 Angle" airgapwidth=0.254
PolygonConnect Polygon_F.Cu-+12V-2_ConnectDirect [IsNamedPolygon('F.Cu-+12V-2')] p1005: connectstyle=Direct reliefconductorwidth=0.254 reliefentries=4 polygonreliefangle="90 Angle" airgapwidth=0.254
PolygonConnect Polygon_F.Cu-+12V-1_ConnectDirect [IsNamedPolygon('F.Cu-+12V-1')] p1006: connectstyle=Direct reliefconductorwidth=0.254 reliefentries=4 polygonreliefangle="90 Angle" airgapwidth=0.254
PolygonConnect Polygon_F.Cu-/USB2.0&USB3.0/CON_USB1_D_N_ConnectDirect [IsNamedPolygon('F.Cu-/USB2.0&USB3.0/CON_USB1_D_N')] p1007: connectstyle=Direct reliefconductorwidth=0.254 reliefentries=4 polygonreliefangle="90 Angle" airgapwidth=0.254
PolygonConnect "Polygon_F.Cu-/LattePanda Module/HSIO_11_TX-_ConnectDirect" [IsNamedPolygon('F.Cu-/LattePanda Module/HSIO_11_TX-')] p1008: connectstyle=Direct reliefconductorwidth=0.254 reliefentries=4 polygonreliefangle="90 Angle" airgapwidth=0.254
PolygonConnect Polygon_F.Cu-Net-(J15-SUSCLK)_ConnectDirect [IsNamedPolygon('F.Cu-Net-(J15-SUSCLK)')] p1009: connectstyle=Direct reliefconductorwidth=0.254 reliefentries=4 polygonreliefangle="90 Angle" airgapwidth=0.254
PolygonConnect Polygon_F.Cu-Net-(JP1-C)_ConnectDirect [IsNamedPolygon('F.Cu-Net-(JP1-C)')] p1010: connectstyle=Direct reliefconductorwidth=0.254 reliefentries=4 polygonreliefangle="90 Angle" airgapwidth=0.254
PolygonConnect Polygon_F.Cu-VDC_ConnectDirect [IsNamedPolygon('F.Cu-VDC')] p1011: connectstyle=Direct reliefconductorwidth=0.254 reliefentries=4 polygonreliefangle="90 Angle" airgapwidth=0.254
PolygonConnect "Polygon_F.Cu-/LattePanda Module/~{PWR_SW}_ConnectDirect" [IsNamedPolygon('F.Cu-/LattePanda Module/~{PWR_SW}')] p1012: connectstyle=Direct reliefconductorwidth=0.254 reliefentries=4 polygonreliefangle="90 Angle" airgapwidth=0.254
PolygonConnect "Polygon_F.Cu-/LattePanda Module/HSIO_3_TX--1_ConnectDirect" [IsNamedPolygon('F.Cu-/LattePanda Module/HSIO_3_TX--1')] p1013: connectstyle=Direct reliefconductorwidth=0.254 reliefentries=4 polygonreliefangle="90 Angle" airgapwidth=0.254
PolygonConnect Polygon_F.Cu-+5V-3_ConnectDirect [IsNamedPolygon('F.Cu-+5V-3')] p1014: connectstyle=Direct reliefconductorwidth=0.254 reliefentries=4 polygonreliefangle="90 Angle" airgapwidth=0.254
PolygonConnect Polygon_F.Cu-/USB2.0&USB3.0/CON_USB4_SSTX_N_ConnectDirect [IsNamedPolygon('F.Cu-/USB2.0&USB3.0/CON_USB4_SSTX_N')] p1015: connectstyle=Direct reliefconductorwidth=0.254 reliefentries=4 polygonreliefangle="90 Angle" airgapwidth=0.254
PolygonConnect Polygon_F.Cu-Net-(U16-FB)-1_ConnectDirect [IsNamedPolygon('F.Cu-Net-(U16-FB)-1')] p1016: connectstyle=Direct reliefconductorwidth=0.254 reliefentries=4 polygonreliefangle="90 Angle" airgapwidth=0.254
PolygonConnect "Polygon_F.Cu-/Gigabit Ethernet/MDI3+_ConnectDirect" [IsNamedPolygon('F.Cu-/Gigabit Ethernet/MDI3+')] p1017: connectstyle=Direct reliefconductorwidth=0.254 reliefentries=4 polygonreliefangle="90 Angle" airgapwidth=0.254
PolygonConnect Polygon_F.Cu-/USB2.0&USB3.0/CON_USB4_D_N-2_ConnectDirect [IsNamedPolygon('F.Cu-/USB2.0&USB3.0/CON_USB4_D_N-2')] p1018: connectstyle=Direct reliefconductorwidth=0.254 reliefentries=4 polygonreliefangle="90 Angle" airgapwidth=0.254
PolygonConnect Polygon_F.Cu-/GPIO/I2C5_SDA_ConnectDirect [IsNamedPolygon('F.Cu-/GPIO/I2C5_SDA')] p1019: connectstyle=Direct reliefconductorwidth=0.254 reliefentries=4 polygonreliefangle="90 Angle" airgapwidth=0.254
PolygonConnect Polygon_F.Cu-/USB2.0&USB3.0/CON_USB4_D_N-1_ConnectDirect [IsNamedPolygon('F.Cu-/USB2.0&USB3.0/CON_USB4_D_N-1')] p1020: connectstyle=Direct reliefconductorwidth=0.254 reliefentries=4 polygonreliefangle="90 Angle" airgapwidth=0.254
PolygonConnect "Polygon_F.Cu-/M.2 E&M Key/~{CLKREQM}_ConnectDirect" [IsNamedPolygon('F.Cu-/M.2 E&M Key/~{CLKREQM}')] p1021: connectstyle=Direct reliefconductorwidth=0.254 reliefentries=4 polygonreliefangle="90 Angle" airgapwidth=0.254
PolygonConnect Polygon_F.Cu-Net-(J3-+5V)_ConnectDirect [IsNamedPolygon('F.Cu-Net-(J3-+5V)')] p1022: connectstyle=Direct reliefconductorwidth=0.254 reliefentries=4 polygonreliefangle="90 Angle" airgapwidth=0.254
PolygonConnect "Polygon_F.Cu-/LattePanda Module/SUSCLK_WIFI-1_ConnectDirect" [IsNamedPolygon('F.Cu-/LattePanda Module/SUSCLK_WIFI-1')] p1023: connectstyle=Direct reliefconductorwidth=0.254 reliefentries=4 polygonreliefangle="90 Angle" airgapwidth=0.254
PolygonConnect Polygon_F.Cu-+3V3-21_ConnectDirect [IsNamedPolygon('F.Cu-+3V3-21')] p1024: connectstyle=Direct reliefconductorwidth=0.254 reliefentries=4 polygonreliefangle="90 Angle" airgapwidth=0.254
PolygonConnect Polygon_F.Cu-+3V3-20_ConnectDirect [IsNamedPolygon('F.Cu-+3V3-20')] p1025: connectstyle=Direct reliefconductorwidth=0.254 reliefentries=4 polygonreliefangle="90 Angle" airgapwidth=0.254
PolygonConnect Polygon_F.Cu-GND-44_ConnectDirect [IsNamedPolygon('F.Cu-GND-44')] p1026: connectstyle=Direct reliefconductorwidth=0.254 reliefentries=4 polygonreliefangle="90 Angle" airgapwidth=0.254
PolygonConnect Polygon_F.Cu-Net-(U14-VDD)_ConnectDirect [IsNamedPolygon('F.Cu-Net-(U14-VDD)')] p1027: connectstyle=Direct reliefconductorwidth=0.254 reliefentries=4 polygonreliefangle="90 Angle" airgapwidth=0.254
PolygonConnect Polygon_F.Cu-GND-43_ConnectDirect [IsNamedPolygon('F.Cu-GND-43')] p1028: connectstyle=Direct reliefconductorwidth=0.254 reliefentries=4 polygonreliefangle="90 Angle" airgapwidth=0.254
PolygonConnect Polygon_F.Cu-/Fan_Temp/FAN_1_PWM_ConnectDirect [IsNamedPolygon('F.Cu-/Fan_Temp/FAN_1_PWM')] p1029: connectstyle=Direct reliefconductorwidth=0.254 reliefentries=4 polygonreliefangle="90 Angle" airgapwidth=0.254
PolygonConnect Polygon_F.Cu-GND-42_ConnectDirect [IsNamedPolygon('F.Cu-GND-42')] p1030: connectstyle=Direct reliefconductorwidth=0.254 reliefentries=4 polygonreliefangle="90 Angle" airgapwidth=0.254
PolygonConnect Polygon_F.Cu-+BATT-1_ConnectDirect [IsNamedPolygon('F.Cu-+BATT-1')] p1031: connectstyle=Direct reliefconductorwidth=0.254 reliefentries=4 polygonreliefangle="90 Angle" airgapwidth=0.254
PolygonConnect Polygon_F.Cu-/HDMI/DDI_B_TX2+_ConnectDirect [IsNamedPolygon('F.Cu-/HDMI/DDI_B_TX2+')] p1032: connectstyle=Direct reliefconductorwidth=0.254 reliefentries=4 polygonreliefangle="90 Angle" airgapwidth=0.254
PolygonConnect "Polygon_F.Cu-/LattePanda Module/HSIO_10_TX-_ConnectDirect" [IsNamedPolygon('F.Cu-/LattePanda Module/HSIO_10_TX-')] p1033: connectstyle=Direct reliefconductorwidth=0.254 reliefentries=4 polygonreliefangle="90 Angle" airgapwidth=0.254
PolygonConnect Polygon_F.Cu-GND-41_ConnectDirect [IsNamedPolygon('F.Cu-GND-41')] p1034: connectstyle=Direct reliefconductorwidth=0.254 reliefentries=4 polygonreliefangle="90 Angle" airgapwidth=0.254
PolygonConnect Polygon_F.Cu-Net-(U13-REF)-1_ConnectDirect [IsNamedPolygon('F.Cu-Net-(U13-REF)-1')] p1035: connectstyle=Direct reliefconductorwidth=0.254 reliefentries=4 polygonreliefangle="90 Angle" airgapwidth=0.254
PolygonConnect Polygon_F.Cu-+3V3-19_ConnectDirect [IsNamedPolygon('F.Cu-+3V3-19')] p1036: connectstyle=Direct reliefconductorwidth=0.254 reliefentries=4 polygonreliefangle="90 Angle" airgapwidth=0.254
PolygonConnect "Polygon_F.Cu-/M.2 E&M Key/CON_PCIE_TX_0-_ConnectDirect" [IsNamedPolygon('F.Cu-/M.2 E&M Key/CON_PCIE_TX_0-')] p1037: connectstyle=Direct reliefconductorwidth=0.254 reliefentries=4 polygonreliefangle="90 Angle" airgapwidth=0.254
PolygonConnect Polygon_F.Cu-Net-(D10-A2)-2_ConnectDirect [IsNamedPolygon('F.Cu-Net-(D10-A2)-2')] p1038: connectstyle=Direct reliefconductorwidth=0.254 reliefentries=4 polygonreliefangle="90 Angle" airgapwidth=0.254
PolygonConnect Polygon_F.Cu-GND-40_ConnectDirect [IsNamedPolygon('F.Cu-GND-40')] p1039: connectstyle=Direct reliefconductorwidth=0.254 reliefentries=4 polygonreliefangle="90 Angle" airgapwidth=0.254
PolygonConnect Polygon_F.Cu-/~{WAKE}_ConnectDirect [IsNamedPolygon('F.Cu-/~{WAKE}')] p1040: connectstyle=Direct reliefconductorwidth=0.254 reliefentries=4 polygonreliefangle="90 Angle" airgapwidth=0.254
PolygonConnect Polygon_F.Cu-GND-39_ConnectDirect [IsNamedPolygon('F.Cu-GND-39')] p1041: connectstyle=Direct reliefconductorwidth=0.254 reliefentries=4 polygonreliefangle="90 Angle" airgapwidth=0.254
PolygonConnect Polygon_F.Cu-GND-38_ConnectDirect [IsNamedPolygon('F.Cu-GND-38')] p1042: connectstyle=Direct reliefconductorwidth=0.254 reliefentries=4 polygonreliefangle="90 Angle" airgapwidth=0.254
PolygonConnect Polygon_F.Cu-+5V-2_ConnectDirect [IsNamedPolygon('F.Cu-+5V-2')] p1043: connectstyle=Direct reliefconductorwidth=0.254 reliefentries=4 polygonreliefangle="90 Angle" airgapwidth=0.254
PolygonConnect Polygon_F.Cu-+3V3-18_ConnectDirect [IsNamedPolygon('F.Cu-+3V3-18')] p1044: connectstyle=Direct reliefconductorwidth=0.254 reliefentries=4 polygonreliefangle="90 Angle" airgapwidth=0.254
PolygonConnect "Polygon_F.Cu-/LattePanda Module/REFCLK3+_ConnectDirect" [IsNamedPolygon('F.Cu-/LattePanda Module/REFCLK3+')] p1045: connectstyle=Direct reliefconductorwidth=0.254 reliefentries=4 polygonreliefangle="90 Angle" airgapwidth=0.254
PolygonConnect Polygon_F.Cu-Net-(D21-A2)-1_ConnectDirect [IsNamedPolygon('F.Cu-Net-(D21-A2)-1')] p1046: connectstyle=Direct reliefconductorwidth=0.254 reliefentries=4 polygonreliefangle="90 Angle" airgapwidth=0.254
PolygonConnect Polygon_F.Cu-GND-37_ConnectDirect [IsNamedPolygon('F.Cu-GND-37')] p1047: connectstyle=Direct reliefconductorwidth=0.254 reliefentries=4 polygonreliefangle="90 Angle" airgapwidth=0.254
PolygonConnect Polygon_F.Cu-/HDMI/TMDS_D2-_ConnectDirect [IsNamedPolygon('F.Cu-/HDMI/TMDS_D2-')] p1048: connectstyle=Direct reliefconductorwidth=0.254 reliefentries=4 polygonreliefangle="90 Angle" airgapwidth=0.254
PolygonConnect Polygon_F.Cu-/USB2.0&USB3.0/CON_USB4_D_P-1_ConnectDirect [IsNamedPolygon('F.Cu-/USB2.0&USB3.0/CON_USB4_D_P-1')] p1049: connectstyle=Direct reliefconductorwidth=0.254 reliefentries=4 polygonreliefangle="90 Angle" airgapwidth=0.254
PolygonConnect Polygon_F.Cu-+3V3-17_ConnectDirect [IsNamedPolygon('F.Cu-+3V3-17')] p1050: connectstyle=Direct reliefconductorwidth=0.254 reliefentries=4 polygonreliefangle="90 Angle" airgapwidth=0.254
PolygonConnect Polygon_F.Cu-+BATT_ConnectDirect [IsNamedPolygon('F.Cu-+BATT')] p1051: connectstyle=Direct reliefconductorwidth=0.254 reliefentries=4 polygonreliefangle="90 Angle" airgapwidth=0.254
PolygonConnect Polygon_F.Cu-Net-(U6-CKXTAL2)-1_ConnectDirect [IsNamedPolygon('F.Cu-Net-(U6-CKXTAL2)-1')] p1052: connectstyle=Direct reliefconductorwidth=0.254 reliefentries=4 polygonreliefangle="90 Angle" airgapwidth=0.254
PolygonConnect Polygon_F.Cu-GND-36_ConnectDirect [IsNamedPolygon('F.Cu-GND-36')] p1053: connectstyle=Direct reliefconductorwidth=0.254 reliefentries=4 polygonreliefangle="90 Angle" airgapwidth=0.254
PolygonConnect Polygon_F.Cu-GND-35_ConnectDirect [IsNamedPolygon('F.Cu-GND-35')] p1054: connectstyle=Direct reliefconductorwidth=0.254 reliefentries=4 polygonreliefangle="90 Angle" airgapwidth=0.254
PolygonConnect "Polygon_F.Cu-/LattePanda Module/REFCLK0+_ConnectDirect" [IsNamedPolygon('F.Cu-/LattePanda Module/REFCLK0+')] p1055: connectstyle=Direct reliefconductorwidth=0.254 reliefentries=4 polygonreliefangle="90 Angle" airgapwidth=0.254
PolygonConnect Polygon_F.Cu-GND-34_ConnectDirect [IsNamedPolygon('F.Cu-GND-34')] p1056: connectstyle=Direct reliefconductorwidth=0.254 reliefentries=4 polygonreliefangle="90 Angle" airgapwidth=0.254
PolygonConnect "Polygon_F.Cu-/LattePanda Module/HSIO_1_TX+_ConnectDirect" [IsNamedPolygon('F.Cu-/LattePanda Module/HSIO_1_TX+')] p1057: connectstyle=Direct reliefconductorwidth=0.254 reliefentries=4 polygonreliefangle="90 Angle" airgapwidth=0.254
PolygonConnect Polygon_F.Cu-/USB2.0&USB3.0/CON_USB2_D_P_ConnectDirect [IsNamedPolygon('F.Cu-/USB2.0&USB3.0/CON_USB2_D_P')] p1058: connectstyle=Direct reliefconductorwidth=0.254 reliefentries=4 polygonreliefangle="90 Angle" airgapwidth=0.254
PolygonConnect "Polygon_F.Cu-/PCIe x4/PCIE30_TX2_P_ConnectDirect" [IsNamedPolygon('F.Cu-/PCIe x4/PCIE30_TX2_P')] p1059: connectstyle=Direct reliefconductorwidth=0.254 reliefentries=4 polygonreliefangle="90 Angle" airgapwidth=0.254
PolygonConnect Polygon_F.Cu-Net-(U13-K)_ConnectDirect [IsNamedPolygon('F.Cu-Net-(U13-K)')] p1060: connectstyle=Direct reliefconductorwidth=0.254 reliefentries=4 polygonreliefangle="90 Angle" airgapwidth=0.254
PolygonConnect Polygon_F.Cu-GND-33_ConnectDirect [IsNamedPolygon('F.Cu-GND-33')] p1061: connectstyle=Direct reliefconductorwidth=0.254 reliefentries=4 polygonreliefangle="90 Angle" airgapwidth=0.254
PolygonConnect Polygon_F.Cu-/HDMI/TMDS_CK+-1_ConnectDirect [IsNamedPolygon('F.Cu-/HDMI/TMDS_CK+-1')] p1062: connectstyle=Direct reliefconductorwidth=0.254 reliefentries=4 polygonreliefangle="90 Angle" airgapwidth=0.254
PolygonConnect Polygon_F.Cu-/GPIO/SOC_UART2_RX_ConnectDirect [IsNamedPolygon('F.Cu-/GPIO/SOC_UART2_RX')] p1063: connectstyle=Direct reliefconductorwidth=0.254 reliefentries=4 polygonreliefangle="90 Angle" airgapwidth=0.254
PolygonConnect Polygon_F.Cu-/USB2.0&USB3.0/CON_USB4_SSRX_N-1_ConnectDirect [IsNamedPolygon('F.Cu-/USB2.0&USB3.0/CON_USB4_SSRX_N-1')] p1064: connectstyle=Direct reliefconductorwidth=0.254 reliefentries=4 polygonreliefangle="90 Angle" airgapwidth=0.254
PolygonConnect Polygon_F.Cu-/~{PLT_RST}_ConnectDirect [IsNamedPolygon('F.Cu-/~{PLT_RST}')] p1065: connectstyle=Direct reliefconductorwidth=0.254 reliefentries=4 polygonreliefangle="90 Angle" airgapwidth=0.254
PolygonConnect Polygon_F.Cu-Net-(A1-SIO_UART_RX)_ConnectDirect [IsNamedPolygon('F.Cu-Net-(A1-SIO_UART_RX)')] p1066: connectstyle=Direct reliefconductorwidth=0.254 reliefentries=4 polygonreliefangle="90 Angle" airgapwidth=0.254
PolygonConnect Polygon_F.Cu-/HDMI/TMDS_D2+-1_ConnectDirect [IsNamedPolygon('F.Cu-/HDMI/TMDS_D2+-1')] p1067: connectstyle=Direct reliefconductorwidth=0.254 reliefentries=4 polygonreliefangle="90 Angle" airgapwidth=0.254
PolygonConnect Polygon_F.Cu-Net-(J6-CT)_ConnectDirect [IsNamedPolygon('F.Cu-Net-(J6-CT)')] p1068: connectstyle=Direct reliefconductorwidth=0.254 reliefentries=4 polygonreliefangle="90 Angle" airgapwidth=0.254
PolygonConnect Polygon_F.Cu-GND-32_ConnectDirect [IsNamedPolygon('F.Cu-GND-32')] p1069: connectstyle=Direct reliefconductorwidth=0.254 reliefentries=4 polygonreliefangle="90 Angle" airgapwidth=0.254
PolygonConnect Polygon_F.Cu-Net-(Q8-G)_ConnectDirect [IsNamedPolygon('F.Cu-Net-(Q8-G)')] p1070: connectstyle=Direct reliefconductorwidth=0.254 reliefentries=4 polygonreliefangle="90 Angle" airgapwidth=0.254
PolygonConnect Polygon_F.Cu-/HDMI/HPD_ConnectDirect [IsNamedPolygon('F.Cu-/HDMI/HPD')] p1071: connectstyle=Direct reliefconductorwidth=0.254 reliefentries=4 polygonreliefangle="90 Angle" airgapwidth=0.254
PolygonConnect Polygon_F.Cu-Net-(U6-LANWAKEB)_ConnectDirect [IsNamedPolygon('F.Cu-Net-(U6-LANWAKEB)')] p1072: connectstyle=Direct reliefconductorwidth=0.254 reliefentries=4 polygonreliefangle="90 Angle" airgapwidth=0.254
PolygonConnect Polygon_F.Cu-GND-31_ConnectDirect [IsNamedPolygon('F.Cu-GND-31')] p1073: connectstyle=Direct reliefconductorwidth=0.254 reliefentries=4 polygonreliefangle="90 Angle" airgapwidth=0.254
PolygonConnect "Polygon_F.Cu-/Gigabit Ethernet/GbE_PCIe_CLK+_ConnectDirect" [IsNamedPolygon('F.Cu-/Gigabit Ethernet/GbE_PCIe_CLK+')] p1074: connectstyle=Direct reliefconductorwidth=0.254 reliefentries=4 polygonreliefangle="90 Angle" airgapwidth=0.254
PolygonConnect Polygon_F.Cu-GND-30_ConnectDirect [IsNamedPolygon('F.Cu-GND-30')] p1075: connectstyle=Direct reliefconductorwidth=0.254 reliefentries=4 polygonreliefangle="90 Angle" airgapwidth=0.254
PolygonConnect "Polygon_F.Cu-/LattePanda Module/REFCLK3-_ConnectDirect" [IsNamedPolygon('F.Cu-/LattePanda Module/REFCLK3-')] p1076: connectstyle=Direct reliefconductorwidth=0.254 reliefentries=4 polygonreliefangle="90 Angle" airgapwidth=0.254
PolygonConnect Polygon_F.Cu-GND-29_ConnectDirect [IsNamedPolygon('F.Cu-GND-29')] p1077: connectstyle=Direct reliefconductorwidth=0.254 reliefentries=4 polygonreliefangle="90 Angle" airgapwidth=0.254
PolygonConnect Polygon_F.Cu-Net-(U6-ISOLATEB)_ConnectDirect [IsNamedPolygon('F.Cu-Net-(U6-ISOLATEB)')] p1078: connectstyle=Direct reliefconductorwidth=0.254 reliefentries=4 polygonreliefangle="90 Angle" airgapwidth=0.254
PolygonConnect Polygon_F.Cu-/USB2.0&USB3.0/CON_USB1_D_P-1_ConnectDirect [IsNamedPolygon('F.Cu-/USB2.0&USB3.0/CON_USB1_D_P-1')] p1079: connectstyle=Direct reliefconductorwidth=0.254 reliefentries=4 polygonreliefangle="90 Angle" airgapwidth=0.254
PolygonConnect "Polygon_F.Cu-/PCIe x4/PCIE30_TX0_N_ConnectDirect" [IsNamedPolygon('F.Cu-/PCIe x4/PCIE30_TX0_N')] p1080: connectstyle=Direct reliefconductorwidth=0.254 reliefentries=4 polygonreliefangle="90 Angle" airgapwidth=0.254
PolygonConnect Polygon_F.Cu-GND-28_ConnectDirect [IsNamedPolygon('F.Cu-GND-28')] p1081: connectstyle=Direct reliefconductorwidth=0.254 reliefentries=4 polygonreliefangle="90 Angle" airgapwidth=0.254
PolygonConnect Polygon_F.Cu-/GPIO/I2C3_SCL-1_ConnectDirect [IsNamedPolygon('F.Cu-/GPIO/I2C3_SCL-1')] p1082: connectstyle=Direct reliefconductorwidth=0.254 reliefentries=4 polygonreliefangle="90 Angle" airgapwidth=0.254
PolygonConnect Polygon_F.Cu-/HDMI/TMDS_D1--1_ConnectDirect [IsNamedPolygon('F.Cu-/HDMI/TMDS_D1--1')] p1083: connectstyle=Direct reliefconductorwidth=0.254 reliefentries=4 polygonreliefangle="90 Angle" airgapwidth=0.254
PolygonConnect Polygon_F.Cu-+1V0-3_ConnectDirect [IsNamedPolygon('F.Cu-+1V0-3')] p1084: connectstyle=Direct reliefconductorwidth=0.254 reliefentries=4 polygonreliefangle="90 Angle" airgapwidth=0.254
PolygonConnect Polygon_F.Cu-GND-27_ConnectDirect [IsNamedPolygon('F.Cu-GND-27')] p1085: connectstyle=Direct reliefconductorwidth=0.254 reliefentries=4 polygonreliefangle="90 Angle" airgapwidth=0.254
PolygonConnect Polygon_F.Cu-GND-26_ConnectDirect [IsNamedPolygon('F.Cu-GND-26')] p1086: connectstyle=Direct reliefconductorwidth=0.254 reliefentries=4 polygonreliefangle="90 Angle" airgapwidth=0.254
PolygonConnect Polygon_F.Cu-GND-25_ConnectDirect [IsNamedPolygon('F.Cu-GND-25')] p1087: connectstyle=Direct reliefconductorwidth=0.254 reliefentries=4 polygonreliefangle="90 Angle" airgapwidth=0.254
PolygonConnect "Polygon_F.Cu-/LattePanda Module/HSIO_8_TX--1_ConnectDirect" [IsNamedPolygon('F.Cu-/LattePanda Module/HSIO_8_TX--1')] p1088: connectstyle=Direct reliefconductorwidth=0.254 reliefentries=4 polygonreliefangle="90 Angle" airgapwidth=0.254
PolygonConnect Polygon_F.Cu-/HDMI/DDI_B_TX0-_ConnectDirect [IsNamedPolygon('F.Cu-/HDMI/DDI_B_TX0-')] p1089: connectstyle=Direct reliefconductorwidth=0.254 reliefentries=4 polygonreliefangle="90 Angle" airgapwidth=0.254